# Altium PCB NS412.PcbDoc
Units mm, origin at the board's own origin, x right, y up, seen from the top; angles counter-clockwise.
Board outline 43.43 x 12.1 mm, 2 copper layers (Top Layer, Bottom Layer); 18 components, 8 nets, 37 pads, 21 vias.
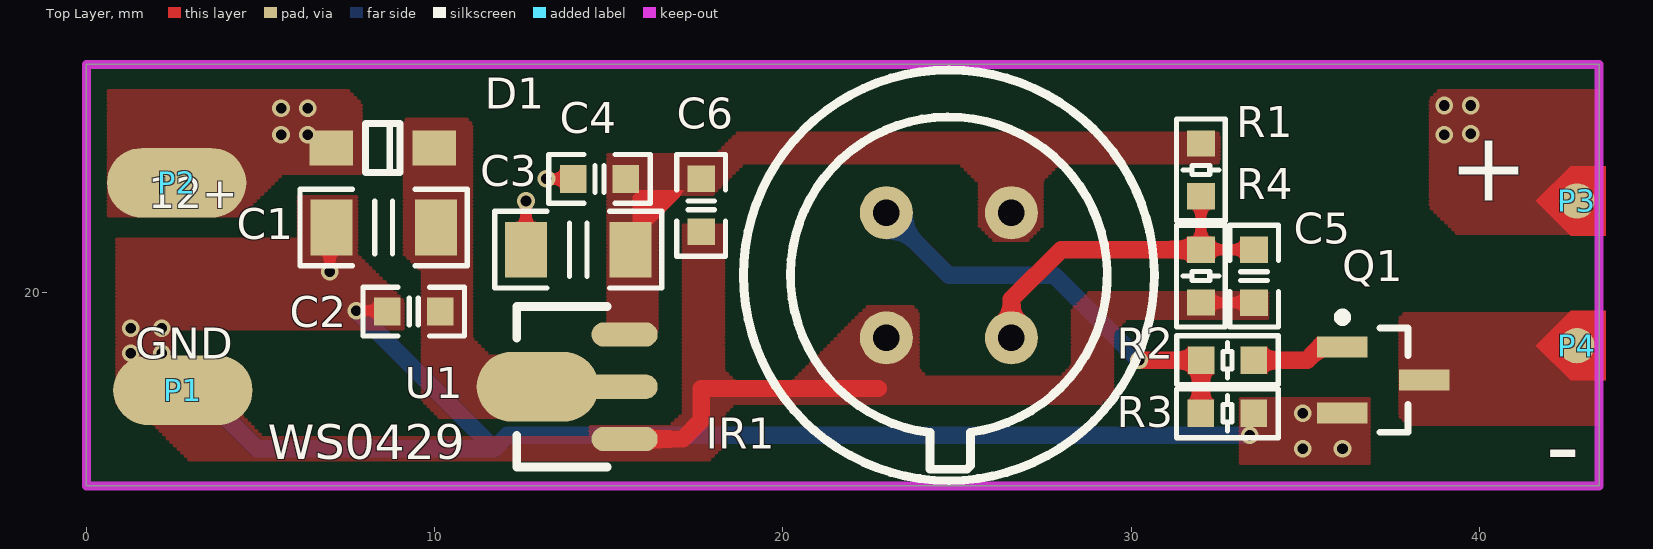
[diagram p0: Top Layer view]
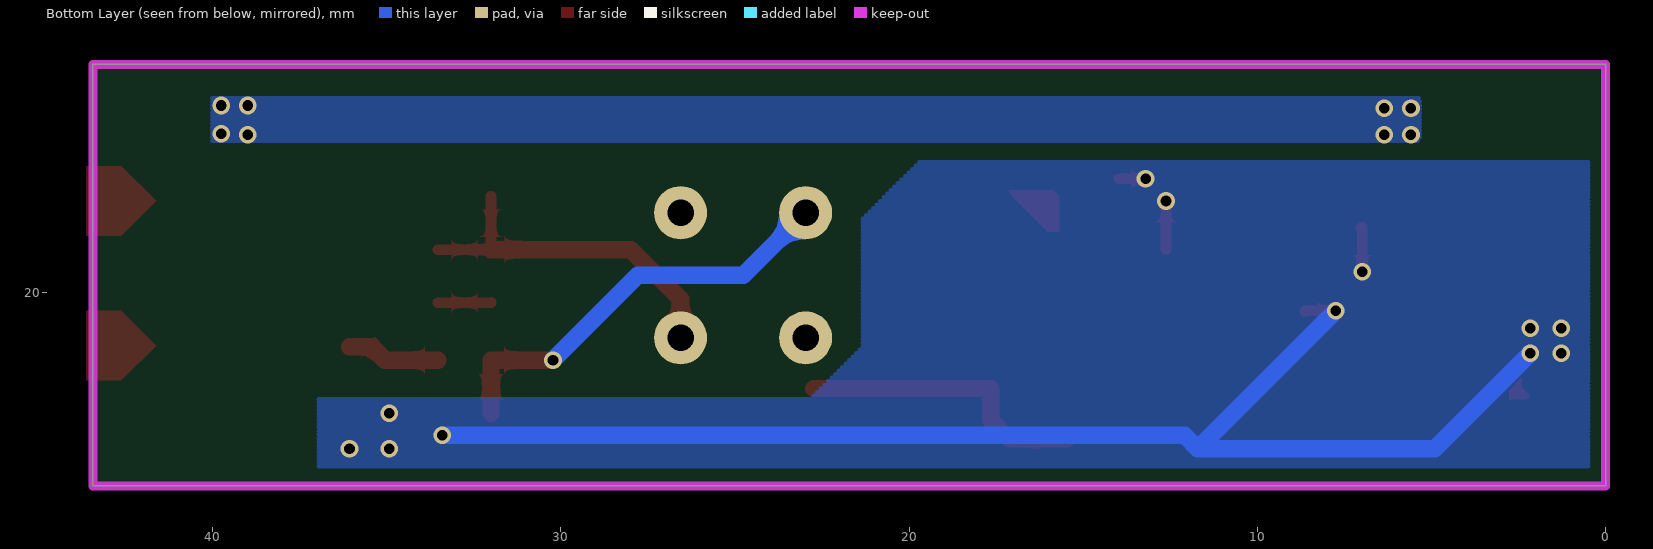
[diagram p1: Bottom Layer view, seen from below]

## Layer stack, top to bottom
Top Solder: solder mask 0.0102, Solder Resist, Dk 3.5
Top Layer: signal copper 0.0356
Dielectric 1: dielectric 0.32, FR-4, Dk 4.8
Bottom Layer: signal copper 0.0356
Bottom Solder: solder mask 0.0102, Solder Resist, Dk 3.5

## Board outline
0,14.445 35.052,14.445 43.434,14.445 43.434,26.545 0,26.545

## Design rules (kind name [scope] priority, off if disabled: settings)
Clearance Clearance_1 [OnLayer('Keep-Out Layer')] p1: gap=0 ignorepadtopadclearanceinfootprint=FALSE
Clearance [All] p2: gap=0.305 ignorepadtopadclearanceinfootprint=FALSE
PolygonConnect [All] p1: connectstyle=Direct reliefconductorwidth=0.254 reliefentries=4 polygonreliefangle="90 Angle" airgapwidth=0.254
RoutingVias [All] p1: holewidth=0.711 width=1.27 viastyle="Through Hole" minholewidth=0.711 minwidth=1.27 maxholewidth=0.711 maxwidth=1.27
SolderMaskExpansion [All] p1: expansion=0.102
Width [All] p1: maxlimit=0.762 minlimit=0.305 preferedwidth=0.305
30 further rules are at their usual default settings.

## Components (designator, comment, footprint, x,y, rotation, side; value= is the part's Value field where it differs from the comment)
C1 "220uF/1206/16v" C1206 8.533,21.863 r90 top
C2 "10uF/0603/16v" C0603 9.398,19.45 r0 top
C3 "100uF/1206/16v" C1206 14.121,21.228 r90 top
C4 "10uF/0603/16v" C0603 14.732,23.26 r0 top
C5 "10uF/0603/16v" C0603 33.528,20.468 r90 top
C6 "100nF/0603/16v" C0603 17.653,22.5 r90 top
D1 "1N4007" SOD123 8.509,24.149 r270 top
IR1 "NS412" NS412 24.765,20.491 r0 top locked
P1 "PAD" PAD 2.769,17.189 r0 top
P2 "PAD" PAD 2.591,23.146 r0 top
P3 "PAD" PAD_to_LIGHT 42.799,22.625 r0 top
P4 "PAD" PAD_to_LIGHT 42.799,18.47 r0 top
Q1 "AO3400/SOT-23" SOT_23_N-MOS 37.243,17.484 r270 top
R1 "1M" R0603 32.004,23.516 r270 top
R2 "100R" R0603 32.766,18.053 r180 top
R3 "10K" R0603 32.764,16.529 r0 top
R4 "200K" R0603 32.004,20.47 r270 top
U1 "HT7530" SOT-89 14.204,17.291 r90 top

## Footprints (in the part's own frame and the unit in brackets; to place one, negate y for a bottom-side part, rotate by r counter-clockwise, add the part's x,y. Pads: shape width x height; smd on the part's side, far side on the other; paste and mask are expansions set on the pad)
C0603 [mm]
  rect 0.76x0.8 smd: 1(-0.76,0) 2(0.76,0)
  silkscreen extent -1.46,-0.7 1.46,0.7
C1206 [mm]
  rect 1.6x1.2 smd: 1(0,1.5) 2(0,-1.5)
  silkscreen extent -1.1,-2.4 1.1,2.4
NS412 [mil]
  round 60 hole 30: 1(-70.71,-70.71) 2(70.71,-70.71) 3(70.71,70.71) 4(-70.71,70.71)
  silkscreen extent -232,-232 232,232
PAD [mm]
  oval 4x2 smd: 1(0,0)
PAD_to_LIGHT [mil]
  round 40 smd: 1(0,0)
  Top Layer region: -46.37,0 -7,-39.37 32.37,-39.37 32.37,39.37 -7,39.37
R0603 [mm]
  rect 0.76x0.8 smd: 1(-0.76,0) 2(0.76,0)
  silkscreen extent -1.46,-0.7 1.46,0.7
SOD123 [mm]
  rect 1x1.25 smd: 1(0,-1.475) 2(0,1.475)
  silkscreen extent -0.7,-0.5 0.7,0.5
SOT-89 [mm]
  oval 2x3.5 smd: 1(0,1.25)
  oval 0.7x2.1 smd: 1(0,-1.15)
  oval 0.7x1.9 smd: 2(-1.5,-1.25) 3(1.5,-1.25)
  silkscreen extent -2.3,-0.75 2.3,1.85, body extent -2.25,-1.8 2.25,2.5, height 1.51
SOT_23_N-MOS [mm]
  rect 0.6x1.45 smd: 1(0,1.175) 2(-0.95,-1.175) 3(0.95,-1.175)
  silkscreen extent -1.92,-1.3 1.5,0.7, body extent -1.5,-0.7 1.5,0.7, height 1.1

## Part data
C1 C2 C3 C4 C5 C6: library part C0603, "0.33uF/0805/16v/10%"
D1: library part Diode, "Default Diode", Code_JEDEC=DO-214-AB, LatestRevisionDate=17-Jul-2002, LatestRevisionNote="Re-released for DXP Platform.", PackageDescription="DO-214-AB/SMC; 2 C-Bend Leads; Body 7.9 x 5.9 mm, inc. leads (LxW)", PackageReference=SMC, PackageVersion=Sep-1996, Published=8-Jun-2000, Publisher="Altium Limited"
Q1: library part MOSFET-N, LatestRevisionDate=17-Jul-2002, LatestRevisionNote="Re-released for DXP Platform.", PackageDescription="TO, Flat Index; 3 In-Line, Axial Leads; Body Dia. 4.6mm; Lead Dia. 0.5 mm (max)", PackageReference=E3, PackageVersion=1995/1996, Published=8-Jun-2000, Publisher="Altium Limited"
R1 R2 R3 R4: library part RES, "Resistor"

## Via types
v1: diameter 0.508, hole 0.305, Top Layer to Bottom Layer, tented both sides, 21 vias

## Nets (pads, with @x,y where several pads share a name; then routed paths per layer and width w, separated by ;. In a path a pad name is that pad's centre, name@x,y a point inside that pad or via, vN(x,y) a via of type N, cw(c..) or ccw(c..) an arc to the next point about the centre after c; other vN are vias at no path point)
3V: C3.2 C4.2 C6.2 IR1.3 R1.1 U1.3
12V: D1.1 P2.1 P3.1
  other v1: 5.588,24.53 6.35,24.53 38.989,24.53 39.751,24.555 5.588,25.292 6.35,25.292 38.989,25.368 39.751,25.368
GND: C1.1 C2.1 C3.1 C4.1 C5.1 C6.1 IR1.1 P1.1 Q1.3 R3.2 R4.2 U1.2 | length 52.5
  Top Layer w0.305: v1(6.985,20.593) 6.985,21.863 C1.1 ; v1(7.747,19.475) 8.638,19.475 C2.1 ; C3.1 v1(12.621,22.625) ; v1(13.208,23.26) C4.1 ; R4.2 R4.2 C5.1
  Top Layer w0.5: U1.2 17.118,15.791 17.653,16.326 17.653,17.24 22.733,17.24
  Bottom Layer w0.5: v1(2.159,18.256) 4.902,15.513 11.709,15.513 ; v1(7.747,19.475) 11.709,15.513 ; v1(33.401,15.894) 12.09,15.894 11.709,15.513
  other v1: 34.925,15.513 36.068,15.513 34.925,16.529 1.27,18.256 1.27,18.967 2.159,18.967
light-: P4.1 Q1.1
NetC1_2: C1.2 C2.2 D1.2 U1.1
NetC5_2: C5.2 IR1.2 R1.2 R4.1 | length 10.2
  Top Layer w0.305: R1.2 R4.1 32.004,21.228 C5.2
  Top Layer w0.5: IR1.2 26.561,19.798 27.991,21.228 R4.1@32.004,21.228
NetIR1_4: IR1.4 R2.2 R3.1 | length 12.3
  Top Layer w0.5: v1(30.226,18.053) R2.2 32.006,16.531 R3.1
  Bottom Layer w0.5: IR1.4 24.765,20.491 27.788,20.491 v1(30.226,18.053)
NetQ1_2: Q1.2 R2.1 | length 2.7
  Top Layer w0.5: R2.1 35.052,18.053 35.433,18.434 Q1.2

## Polygon pours and split planes (outlines as drawn)
GND on Top Layer "Top Layer-GND 4" (hatched Horizontal grid 0.102 track 0.127, remove dead copper, pour order 20): 33.147,17.037 33.147,15.005 36.83,15.005 36.83,17.037
GND on Top Layer (hatched Horizontal grid 0.102 track 0.127, remove dead copper, pour order 56): 33.909,20.085 33.909,19.196 29.816,19.196 29.464,18.843 29.464,17.164 29.134,16.834 20.701,16.834 20.193,17.342 22.53,19.678 23.622,19.678 23.876,19.424 23.876,17.799 24.13,17.545 27.965,17.545 28.321,17.9 28.321,19.513 28.892,20.085
3V on Top Layer (hatched Horizontal grid 0.102 track 0.127, remove dead copper, pour order 54): 16.256,24.047 18.186,24.047 18.732,24.593 32.449,24.593 32.512,24.53 32.512,23.768 32.474,23.73 27.953,23.73 27.432,23.209 27.432,21.914 26.987,21.469 26.098,21.469 25.654,21.914 25.654,23.133 25.057,23.73 18.885,23.73 17.882,22.726 16.383,22.726 16.383,23.92
no net on Top Layer (hatched Horizontal grid 0.102 track 0.127, remove dead copper, pour order 52): 16.383,24.022
no net on Top Layer (hatched Horizontal grid 0.102 track 0.127, remove dead copper, pour order 48): 33.782,20.085
light- on Top Layer "Top Layer-light-" (hatched Horizontal grid 0.102 track 0.127, remove dead copper, pour order 46): 37.922,19.45 43.434,19.45 43.434,16.224 37.948,16.224 37.719,16.453 37.719,19.247
no net on Top Layer "Top Layer-No Net" (hatched Horizontal grid 0.102 track 0.127, remove dead copper, pour order 44): 37.719,18.18
12V on Top Layer "Top Layer-12V" (hatched Horizontal grid 0.102 track 0.127, remove dead copper, pour order 42): 38.608,25.546 38.608,22.447 39.395,21.66 43.434,21.66 43.434,25.8 38.862,25.8
no net on Top Layer "Top Layer-No Net 1" (hatched Horizontal grid 0.102 track 0.127, remove dead copper, pour order 40): 40.513,25.927
GND on Top Layer "Top Layer-GND" (hatched Horizontal grid 0.102 track 0.127, remove dead copper, pour order 32): 0.889,21.507 0.889,18.866 9.08,18.866 9.08,19.767 8.255,20.593 7.747,21.101 7.747,22.765 6.096,22.765 6.096,21.507
GND on Top Layer "Top Layer-GND 1" (hatched Horizontal grid 0.102 track 0.127, remove dead copper, pour order 28): 0.889,16.834 0.889,19.247 1.092,19.45 2.413,19.45 2.413,16.834
GND on Top Layer "Top Layer-GND 2" (hatched Horizontal grid 0.102 track 0.127, remove dead copper, pour order 24): 14.478,15.868 5.029,15.868 2.87,18.027 1.499,16.656 3.023,15.132 14.478,15.132
GND on Top Layer "Top Layer-GND 3" (hatched Horizontal grid 0.102 track 0.127, remove dead copper, pour order 22): 23.241,17.443 18.599,17.443 18.288,17.754 18.288,22.015 17.145,22.015 17.145,16.529 16.84,16.224 14.478,16.224 14.478,15.132 17.805,15.132 18.288,15.614 18.288,16.503 18.618,16.834 23.241,16.834
3V on Top Layer "Top Layer-3V 2" (hatched Horizontal grid 0.102 track 0.127, remove dead copper, pour order 4): 16.383,18.891 16.383,24.047 14.986,24.047 14.986,18.561 16.053,18.561
NetC1_2 on Top Layer "Top Layer-NetC1_2" (hatched Horizontal grid 0.102 track 0.127, remove dead copper, pour order 2): 11.049,24.835 11.049,18.688 11.557,18.18 12.7,18.18 12.7,16.402 10.16,16.402 9.652,16.91 9.652,20.593 9.144,21.101 9.144,24.911 9.296,25.063 10.82,25.063
12V on Top Layer "Top Layer-12V 1" (hatched Horizontal grid 0.102 track 0.127, remove dead copper, pour order 0): 0.635,23.387 0.635,22.136 4.35,22.136 5.601,23.387 7.874,23.387 7.874,25.419 7.493,25.8 0.635,25.8
12V on Bottom Layer "Bottom Layer-12V" (hatched Horizontal grid 0.102 track 0.127, remove dead copper, pour order 38): 5.334,25.546 5.334,24.403 5.461,24.276 40.005,24.276 40.005,25.673 5.461,25.673
GND on Bottom Layer "Bottom Layer-GND" (hatched Horizontal grid 0.102 track 0.127, remove dead copper, pour order 36): 0,23.768 11.684,23.768 19.685,23.768 21.336,22.117 21.336,18.434 22.733,17.037 36.957,17.037 36.957,14.445 0,14.445
no net on Bottom Layer "Bottom Layer-No Net" (hatched Horizontal grid 0.102 track 0.127, remove dead copper, pour order 34): 0,26.545

## Keep-outs
Keep-Out Layer:
  the board outline again, w0.254

## Other copper
Top Layer:
  region net GND: 2.413,17.545 2.769,17.189 2.769,16.935 2.261,16.935 2.159,17.037 2.413,17.291 2.413,17.443
  region net GND: 18.923,19.983
  region net 3V: 17.018,22.726 16.027,21.736 15.684,21.736 15.684,22.765 15.85,22.93 17.145,22.93

## Silkscreen, mask and mechanical layers (free items; w line width, h text height)
Top Overlay:
  text "+" at 39.116,22.625 h2
  text "12+" at 1.778,22.117 h1.52
  text "GND" at 1.397,17.799 h1.52
  text "WS0429" at 5.207,15.208 h1
  text "-" at 41.91,14.624 h2